# Altium PCB HBridgeMainBoard.PcbDoc (part 3 of 3)
Units mm, origin at the board's own origin, x right, y up, seen from the top; angles counter-clockwise.
Board outline 100 x 50 mm, 2 copper layers (Top Layer, Bottom Layer); 90 components, 87 nets, 308 pads, 1694 vias.
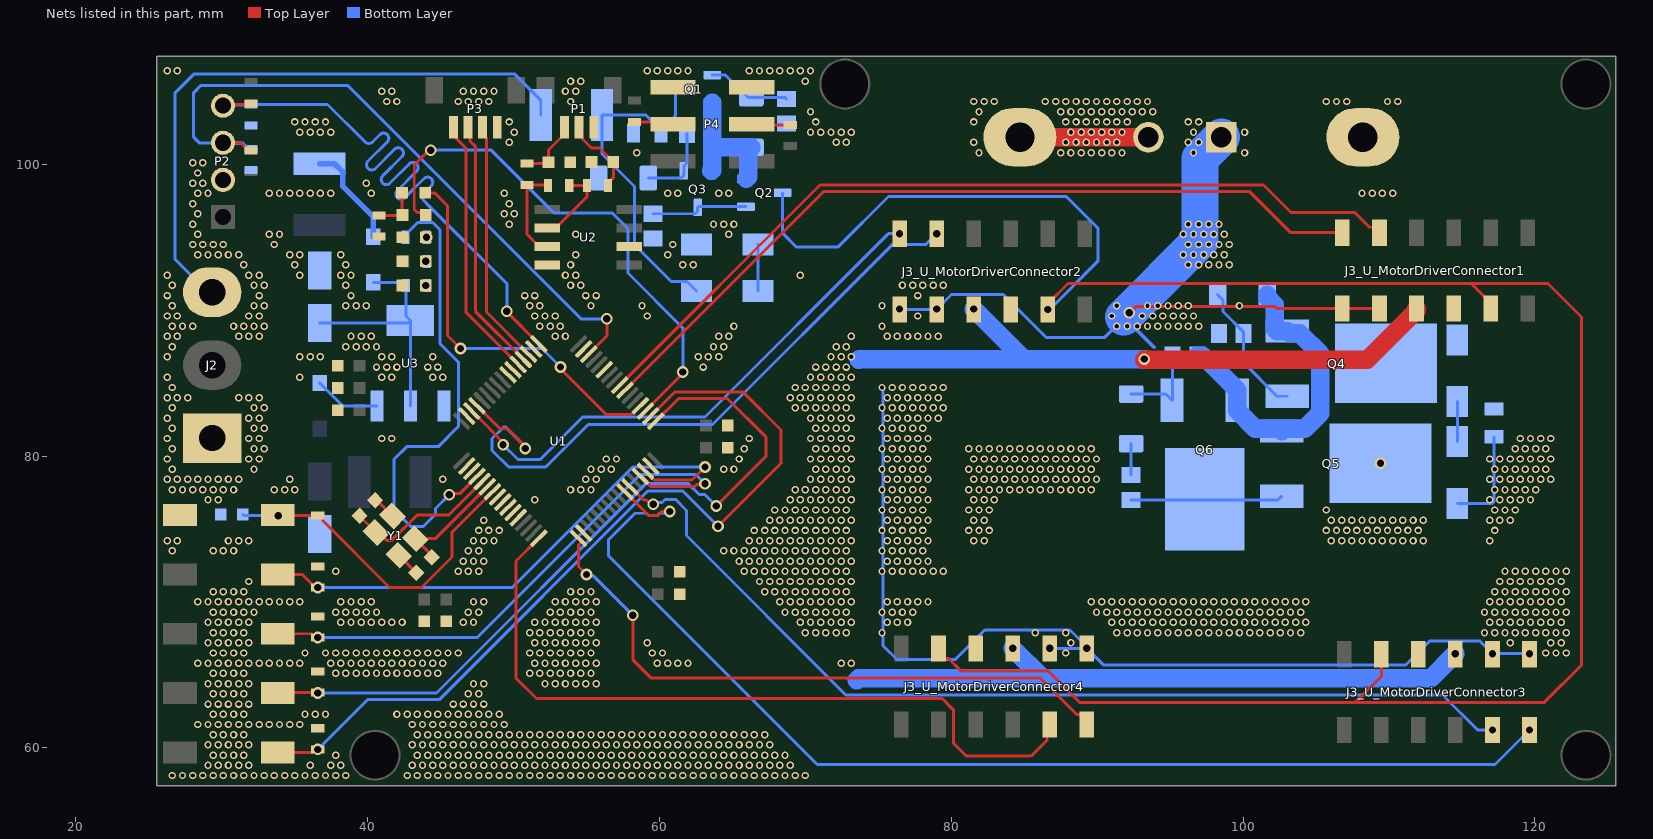
[diagram p2: the nets of this part, all layers, seen from the top]

## Via types
v1: diameter 0.508, hole 0.3, Top Layer to Bottom Layer, tented both sides, 1624 vias
v2: diameter 0.8, hole 0.5, Top Layer to Bottom Layer, tented both sides, 64 vias
v3: diameter 0.8, hole 0.5, Top Layer to Bottom Layer, 6 vias

## Nets (pads, with @x,y where several pads share a name; then routed paths per layer and width w, separated by ;. In a path a pad name is that pad's centre, name@x,y a point inside that pad or via, vN(x,y) a via of type N, cw(c..) or ccw(c..) an arc to the next point about the centre after c; other vN are vias at no path point) (continued)
GND: C1.1 C2.1 C3.1 C4.1 C5.1 C6.1 C7.1 C8.1 C9.1 C10.1 C11.1 C12.1 C13.1 C14.1 C15.2 C16.2 C17.1 D3.1 D4.1 D7.1 D10.C D11.A J2.1 J3_U_MotorDriverConnector1.8 J3_U_MotorDriverConnector2.8 J3_U_MotorDriverConnector3.8 J3_U_MotorDriverConnector4.8 P1.3 P2.2 P3.4 P4.5 P4.6 R1.1 R7.1 R8.1 R11_U_MotorDriverConnector1.1 R11_U_MotorDriverConnector2.1 R11_U_MotorDriverConnector3.1 R11_U_MotorDriverConnector4.1 R17.1 R18.1 SW1.1 U1.12 U1.18 U1.31 U1.47 U1.63 U2.2 U2.8 U3.1 Y1.2 Y1.4 | length 92.6
  Top Layer w0.203: C11.1@40.498,76.966 40.624,76.966 Y1.4@41.698,75.893 ; Y1.2@42.122,73.205 C12.1@43.322,72.006
  Top Layer w1.27: v2@93.218,86.614 108.521,86.614 111.887,89.98 J3_U_MotorDriverConnector1.8@111.887,90.11
  Bottom Layer w1.27: 73.533,64.643 73.66,64.77 86.264,64.77 ; 73.66,86.614 73.691,86.645 84.963,86.645 ; v2(81.534,90.074) 84.963,86.645 ; v2(84.201,66.833) 86.264,64.77 ; v2(93.218,86.645) 84.963,86.645 ; v2(114.549,66.446) 112.872,64.77 86.264,64.77
  other v1: 26.6,58.1 27.3,58.1 28,58.1 28.7,58.1 29.4,58.1 30.1,58.1 30.8,58.1 31.5,58.1 32.2,58.1 32.9,58.1 33.6,58.1 34.3,58.1 35,58.1 35.7,58.1 36.4,58.1 37.1,58.1 37.8,58.1 38.5,58.1 42.7,58.1 43.4,58.1 44.1,58.1 44.8,58.1 45.5,58.1 46.2,58.1 46.9,58.1 47.6,58.1 48.3,58.1 49,58.1 49.7,58.1 50.4,58.1 51.1,58.1 51.8,58.1 52.5,58.1 53.2,58.1 53.9,58.1 54.6,58.1 55.3,58.1 56,58.1 56.7,58.1 57.4,58.1 58.1,58.1 58.8,58.1 59.5,58.1 60.2,58.1 60.9,58.1 61.6,58.1 62.3,58.1 63,58.1 63.7,58.1 64.4,58.1 65.1,58.1 65.8,58.1 66.5,58.1 67.2,58.1 67.9,58.1 68.6,58.1 69.3,58.1 70,58.1 29.05,58.8 29.75,58.8 30.45,58.8 31.15,58.8 31.85,58.8 36.05,58.8 37.45,58.8 38.15,58.8 43.05,58.8 43.75,58.8 44.45,58.8 45.15,58.8 45.85,58.8 46.55,58.8 47.25,58.8 47.95,58.8 48.65,58.8 49.35,58.8 50.05,58.8 50.75,58.8 51.45,58.8 52.15,58.8 52.85,58.8 53.55,58.8 54.25,58.8 54.95,58.8 55.65,58.8 56.35,58.8 57.05,58.8 57.75,58.8 58.45,58.8 59.15,58.8 59.85,58.8 60.55,58.8 61.25,58.8 61.95,58.8 62.65,58.8 63.35,58.8 64.05,58.8 64.75,58.8 65.45,58.8 66.15,58.8 66.85,58.8 67.55,58.8 68.25,58.8 68.95,58.8 29.4,59.5 30.1,59.5 30.8,59.5 31.5,59.5 37.8,59.5 43.4,59.5 44.1,59.5 44.8,59.5 45.5,59.5 46.2,59.5 46.9,59.5 47.6,59.5 48.3,59.5 49,59.5 49.7,59.5 50.4,59.5 51.1,59.5 51.8,59.5 52.5,59.5 53.2,59.5 53.9,59.5 54.6,59.5 55.3,59.5 56,59.5 56.7,59.5 57.4,59.5 58.1,59.5 58.8,59.5 59.5,59.5 60.2,59.5 60.9,59.5 61.6,59.5 62.3,59.5 63,59.5 63.7,59.5 64.4,59.5 65.1,59.5 65.8,59.5 66.5,59.5 67.2,59.5 67.9,59.5 68.6,59.5 29.05,60.2 29.75,60.2 30.45,60.2 31.15,60.2 31.85,60.2 43.05,60.2 43.75,60.2 44.45,60.2 45.15,60.2 45.85,60.2 46.55,60.2 47.25,60.2 47.95,60.2 48.65,60.2 49.35,60.2 50.05,60.2 50.75,60.2 51.45,60.2 52.15,60.2 52.85,60.2 53.55,60.2 54.25,60.2 54.95,60.2 55.65,60.2 56.35,60.2 57.05,60.2 57.75,60.2 58.45,60.2 59.15,60.2 59.85,60.2 60.55,60.2 61.25,60.2 61.95,60.2 62.65,60.2 63.35,60.2 64.05,60.2 64.75,60.2 65.45,60.2 66.15,60.2 66.85,60.2 67.55,60.2 29.4,60.9 30.1,60.9 30.8,60.9 31.5,60.9 43.4,60.9 44.1,60.9 44.8,60.9 45.5,60.9 46.2,60.9 46.9,60.9 47.6,60.9 48.3,60.9 49,60.9 49.7,60.9 50.4,60.9 51.1,60.9 51.8,60.9 52.5,60.9 53.2,60.9 53.9,60.9 54.6,60.9 55.3,60.9 56,60.9 56.7,60.9 57.4,60.9 58.1,60.9 58.8,60.9 59.5,60.9 60.2,60.9 60.9,60.9 61.6,60.9 62.3,60.9 63,60.9 63.7,60.9 64.4,60.9 65.1,60.9 65.8,60.9 66.5,60.9 67.2,60.9 28.35,61.6 29.05,61.6 29.75,61.6 30.45,61.6 31.15,61.6 31.85,61.6 32.55,61.6 33.25,61.6 33.95,61.6 34.65,61.6 35.35,61.6 43.05,61.6 43.75,61.6 44.45,61.6 45.15,61.6 45.85,61.6 46.55,61.6 47.25,61.6 47.95,61.6 48.65,61.6 49.35,61.6 29.4,62.3 30.1,62.3 30.8,62.3 31.5,62.3 35.7,62.3 36.4,62.3 37.1,62.3 42,62.3 42.7,62.3 43.4,62.3 44.1,62.3 44.8,62.3 45.5,62.3 46.2,62.3 46.9,62.3 47.6,62.3 48.3,62.3 49,62.3 29.05,63 29.75,63 30.45,63 31.15,63 31.85,63 45.85,63 46.55,63 47.25,63 47.95,63 29.4,63.7 30.1,63.7 30.8,63.7 31.5,63.7 46.9,63.7 47.6,63.7 29.05,64.4 29.75,64.4 30.45,64.4 31.15,64.4 31.85,64.4 47.25,64.4 47.95,64.4 52.15,64.4 52.85,64.4 53.55,64.4 54.25,64.4 54.95,64.4 55.65,64.4 29.4,65.1 30.1,65.1 30.8,65.1 31.5,65.1 37.8,65.1 38.5,65.1 39.2,65.1 39.9,65.1 40.6,65.1 41.3,65.1 42,65.1 42.7,65.1 43.4,65.1 44.1,65.1 44.8,65.1 51.1,65.1 51.8,65.1 52.5,65.1 53.2,65.1 53.9,65.1 54.6,65.1 55.3,65.1 28.35,65.8 29.05,65.8 29.75,65.8 30.45,65.8 31.15,65.8 31.85,65.8 32.55,65.8 33.25,65.8 33.95,65.8 34.65,65.8 35.35,65.8 37.45,65.8 38.15,65.8 38.85,65.8 39.55,65.8 40.25,65.8 40.95,65.8 41.65,65.8 42.35,65.8 43.05,65.8 43.75,65.8 44.45,65.8 45.15,65.8 51.45,65.8 52.15,65.8 52.85,65.8 53.55,65.8 54.25,65.8 54.95,65.8 55.65,65.8 59.85,65.8 60.55,65.8 61.25,65.8 61.95,65.8 72.45,65.8 73.15,65.8 29.4,66.5 30.1,66.5 30.8,66.5 31.5,66.5 35.7,66.5 37.1,66.5 37.8,66.5 38.5,66.5 39.2,66.5 39.9,66.5 40.6,66.5 41.3,66.5 42,66.5 42.7,66.5 43.4,66.5 44.1,66.5 44.8,66.5 45.5,66.5 46.2,66.5 51.1,66.5 51.8,66.5 52.5,66.5 53.2,66.5 53.9,66.5 54.6,66.5 55.3,66.5 59.5,66.5 60.2,66.5 29.05,67.2 29.75,67.2 30.45,67.2 31.15,67.2 31.85,67.2 51.45,67.2 52.15,67.2 52.85,67.2 53.55,67.2 54.25,67.2 54.95,67.2 55.65,67.2 59.15,67.2 29.4,67.9 30.1,67.9 30.8,67.9 31.5,67.9 51.1,67.9 51.8,67.9 52.5,67.9 53.2,67.9 53.9,67.9 54.6,67.9 55.3,67.9 70,67.9 70.7,67.9 71.4,67.9 72.1,67.9 72.8,67.9 29.05,68.6 29.75,68.6 30.45,68.6 31.15,68.6 31.85,68.6 38.15,68.6 38.85,68.6 39.55,68.6 40.25,68.6 40.95,68.6 41.65,68.6 42.35,68.6 46.55,68.6 47.25,68.6 51.45,68.6 52.15,68.6 52.85,68.6 53.55,68.6 54.25,68.6 54.95,68.6 55.65,68.6 69.65,68.6 70.35,68.6 71.05,68.6 71.75,68.6 72.45,68.6 73.15,68.6 29.4,69.3 30.1,69.3 30.8,69.3 31.5,69.3 32.2,69.3 37.8,69.3 38.5,69.3 39.2,69.3 39.9,69.3 40.6,69.3 46.9,69.3 47.6,69.3 52.5,69.3 53.2,69.3 53.9,69.3 54.6,69.3 55.3,69.3 68.6,69.3 69.3,69.3 70,69.3 70.7,69.3 71.4,69.3 72.1,69.3 72.8,69.3 28.35,70 29.05,70 29.75,70 30.45,70 31.15,70 31.85,70 32.55,70 33.25,70 33.95,70 34.65,70 35.35,70 38.15,70 38.85,70 39.55,70 40.25,70 47.25,70 47.95,70 52.85,70 53.55,70 54.25,70 54.95,70 55.65,70 68.25,70 68.95,70 69.65,70 70.35,70 71.05,70 71.75,70 72.45,70 73.15,70 29.4,70.7 30.1,70.7 30.8,70.7 31.5,70.7 53.9,70.7 54.6,70.7 55.3,70.7 67.2,70.7 67.9,70.7 68.6,70.7 69.3,70.7 70,70.7 70.7,70.7 71.4,70.7 72.1,70.7 72.8,70.7 31.85,71.4 66.85,71.4 67.55,71.4 68.25,71.4 68.95,71.4 69.65,71.4 70.35,71.4 71.05,71.4 71.75,71.4 72.45,71.4 73.15,71.4 37.8,72.1 46.2,72.1 46.9,72.1 47.6,72.1 65.8,72.1 66.5,72.1 67.2,72.1 67.9,72.1 68.6,72.1 69.3,72.1 70,72.1 70.7,72.1 71.4,72.1 72.1,72.1 72.8,72.1 46.55,72.8 47.25,72.8 47.95,72.8 65.45,72.8 66.15,72.8 66.85,72.8 67.55,72.8 68.25,72.8 68.95,72.8 69.65,72.8 70.35,72.8 71.05,72.8 71.75,72.8 72.45,72.8 73.15,72.8 26.6,73.5 29.4,73.5 30.1,73.5 30.8,73.5 46.9,73.5 47.6,73.5 64.4,73.5 65.1,73.5 65.8,73.5 66.5,73.5 67.2,73.5 67.9,73.5 68.6,73.5 69.3,73.5 70,73.5 70.7,73.5 71.4,73.5 72.1,73.5 72.8,73.5 26.25,74.2 26.95,74.2 30.45,74.2 31.15,74.2 31.85,74.2 47.25,74.2 47.95,74.2 48.65,74.2 66.15,74.2 66.85,74.2 67.55,74.2 68.25,74.2 68.95,74.2 69.65,74.2 70.35,74.2 71.05,74.2 71.75,74.2 72.45,74.2 73.15,74.2 47.6,74.9 48.3,74.9 49,74.9 66.5,74.9 67.2,74.9 67.9,74.9 68.6,74.9 69.3,74.9 70,74.9 70.7,74.9 71.4,74.9 72.1,74.9 72.8,74.9 47.95,75.6 67.55,75.6 68.25,75.6 68.95,75.6 69.65,75.6 70.35,75.6 71.05,75.6 71.75,75.6 72.45,75.6 73.15,75.6 67.9,76.3 68.6,76.3 69.3,76.3 70,76.3 70.7,76.3 71.4,76.3 72.1,76.3 72.8,76.3 29.05,77 29.75,77 51.45,77 68.95,77 69.65,77 70.35,77 71.05,77 71.75,77 72.45,77 73.15,77 26.6,77.7 27.3,77.7 28,77.7 28.7,77.7 29.4,77.7 30.1,77.7 30.8,77.7 33.6,77.7 34.3,77.7 35,77.7 53.9,77.7 54.6,77.7 55.3,77.7 69.3,77.7 70,77.7 70.7,77.7 71.4,77.7 72.1,77.7 72.8,77.7 26.25,78.4 26.95,78.4 27.65,78.4 28.35,78.4 29.05,78.4 29.75,78.4 30.45,78.4 31.15,78.4 34.65,78.4 45.15,78.4 54.95,78.4 55.65,78.4 70.35,78.4 71.05,78.4 71.75,78.4 72.45,78.4 73.15,78.4 26.6,79.1 32.2,79.1 55.3,79.1 56,79.1 56.7,79.1 64.4,79.1 65.1,79.1 70.7,79.1 71.4,79.1 72.1,79.1 72.8,79.1 26.25,79.8 31.85,79.8 32.55,79.8 56.35,79.8 57.05,79.8 65.45,79.8 70.35,79.8 71.05,79.8 71.75,79.8 72.45,79.8 73.15,79.8 26.6,80.5 32.2,80.5 32.9,80.5 65.8,80.5 70.7,80.5 71.4,80.5 72.1,80.5 72.8,80.5 26.25,81.2 31.85,81.2 32.55,81.2 40.95,81.2 41.65,81.2 66.15,81.2 70.35,81.2 71.05,81.2 71.75,81.2 72.45,81.2 73.15,81.2 26.6,81.9 32.2,81.9 32.9,81.9 70.7,81.9 71.4,81.9 72.1,81.9 72.8,81.9 26.25,82.6 31.85,82.6 32.55,82.6 70.35,82.6 71.05,82.6 71.75,82.6 72.45,82.6 73.15,82.6 26.6,83.3 32.2,83.3 32.9,83.3 69.3,83.3 70,83.3 70.7,83.3 71.4,83.3 72.1,83.3 72.8,83.3 26.25,84 26.95,84 27.65,84 31.15,84 31.85,84 32.55,84 68.95,84 69.65,84 70.35,84 71.05,84 71.75,84 72.45,84 73.15,84 26.6,84.7 69.3,84.7 70,84.7 70.7,84.7 71.4,84.7 72.1,84.7 72.8,84.7 26.25,85.4 35.35,85.4 40.95,85.4 41.65,85.4 44.45,85.4 45.15,85.4 70.35,85.4 71.05,85.4 71.75,85.4 72.45,85.4 73.15,85.4 40.6,86.1 41.3,86.1 42,86.1 44.1,86.1 44.8,86.1 63,86.1 70.7,86.1 71.4,86.1 72.1,86.1 72.8,86.1 26.25,86.8 35.35,86.8 36.05,86.8 36.75,86.8 40.95,86.8 41.65,86.8 44.45,86.8 62.65,86.8 63.35,86.8 64.05,86.8 71.75,86.8 72.45,86.8 73.15,86.8 26.6,87.5 38.5,87.5 39.2,87.5 39.9,87.5 40.6,87.5 63.7,87.5 64.4,87.5 72.1,87.5 72.8,87.5 26.25,88.2 26.95,88.2 31.15,88.2 31.85,88.2 32.55,88.2 38.85,88.2 39.55,88.2 40.25,88.2 52.85,88.2 53.55,88.2 64.05,88.2 64.75,88.2 73.15,88.2 26.6,88.9 27.3,88.9 28,88.9 30.8,88.9 31.5,88.9 32.2,88.9 32.9,88.9 51.8,88.9 52.5,88.9 53.2,88.9 65.1,88.9 26.25,89.6 26.95,89.6 31.85,89.6 32.55,89.6 51.45,89.6 52.15,89.6 52.85,89.6 59.15,89.6 26.6,90.3 32.2,90.3 32.9,90.3 38.5,90.3 39.2,90.3 39.9,90.3 51.1,90.3 51.8,90.3 55.3,90.3 58.8,90.3 26.25,91 32.55,91 38.85,91 50.75,91 51.45,91 54.95,91 55.65,91 26.6,91.7 32.2,91.7 32.9,91.7 38.5,91.7 53.9,91.7 54.6,91.7 26.25,92.4 31.85,92.4 32.55,92.4 35.35,92.4 38.15,92.4 38.85,92.4 53.55,92.4 54.25,92.4 69.65,92.4 31.5,93.1 35,93.1 38.5,93.1 53.9,93.1 61.6,93.1 62.3,93.1 28.35,93.8 29.05,93.8 29.75,93.8 30.45,93.8 31.15,93.8 34.65,93.8 35.35,93.8 38.15,93.8 54.25,93.8 60.55,93.8 28,94.5 28.7,94.5 29.4,94.5 30.1,94.5 33.6,94.5 60.9,94.5 28.35,95.2 33.25,95.2 33.95,95.2 54.25,95.2 64.75,95.2 28,95.9 49.7,95.9 63.7,95.9 64.4,95.9 65.1,95.9 28.35,96.6 49.35,96.6 50.05,96.6 28,97.3 49.7,97.3 28.35,98 29.05,98 33.25,98 33.95,98 34.65,98 35.35,98 36.05,98 36.75,98 37.45,98 40.25,98 49.35,98 60.55,98 61.25,98 64.05,98 64.75,98 28,98.7 28.7,98.7 39.9,98.7 28.35,99.4 28,100.1 28.7,100.1 58.45,100.8 49.7,101.5 72.1,101.5 72.8,101.5 35.35,102.2 36.05,102.2 36.75,102.2 37.45,102.2 50.05,102.2 70.35,102.2 71.05,102.2 71.75,102.2 72.45,102.2 73.15,102.2 35,102.9 35.7,102.9 36.4,102.9 37.1,102.9 49.7,102.9 70.7,102.9 70.35,103.6 41.3,104.3 42,104.3 46.2,104.3 46.9,104.3 47.6,104.3 48.3,104.3 53.9,104.3 40.95,105 41.65,105 46.55,105 47.25,105 47.95,105 48.65,105 53.55,105 54.25,105 53.9,105.7 54.6,105.7 70,105.7 26.25,106.4 26.95,106.4 59.15,106.4 59.85,106.4 60.55,106.4 61.25,106.4 61.95,106.4 66.15,106.4 66.85,106.4 67.55,106.4 68.25,106.4 68.95,106.4 69.65,106.4 70.35,106.4
MGND: C18.1 D14.C D15.A J1.1 J3_U_MotorDriverConnector1.10 J3_U_MotorDriverConnector1.12 J3_U_MotorDriverConnector2.10 J3_U_MotorDriverConnector2.12 J3_U_MotorDriverConnector3.10 J3_U_MotorDriverConnector3.12 J3_U_MotorDriverConnector4.10 J3_U_MotorDriverConnector4.12 R20.1 R21.1 | length 130.3
  Top Layer w0.203: v2@92.202,89.789 92.65,90.237 102.202,90.237 102.329,90.11 J3_U_MotorDriverConnector1.10@109.347,90.11
  Bottom Layer w0.203: v1@75.43,84.669 75.311,84.55 75.311,67.003 76.268,66.046 80.27,66.046 82.296,68.072 88.138,68.072 89.121,67.089 89.121,66.921 89.002,66.802 v2@86.868,66.802 ; v2@76.327,90.043 78.994,90.043 80.015,91.064 83.561,91.064 86.487,88.138 90.52,88.138 v2(92.202,89.82) ; v2(89.281,66.833) 90.448,65.665 111.131,65.665 112.776,67.31 116.236,67.31 v2(117.094,66.452) v2(119.634,66.452) ; R21.1@92.329,78.701 D15.A@92.329,80.85 ; D14.C@114.681,76.752 117.077,76.752 117.196,76.871 C18.1@117.196,81.321
  Bottom Layer w0.254: 91.821,89.535 93.902,87.454
  Bottom Layer w2.54: 91.821,89.535 97.04,94.754 97.04,100.382 J1.1@98.512,101.854
  other v1: 87.85,66.5 120.75,66.5 121.45,66.5 122.15,66.5 88.2,67.2 118.3,67.2 121.1,67.2 121.8,67.2 75.25,67.9 85.75,67.9 87.85,67.9 91.35,67.9 92.05,67.9 92.75,67.9 93.45,67.9 94.15,67.9 94.85,67.9 95.55,67.9 96.25,67.9 96.95,67.9 97.65,67.9 98.35,67.9 99.05,67.9 99.75,67.9 100.45,67.9 101.15,67.9 101.85,67.9 102.55,67.9 103.25,67.9 103.95,67.9 116.55,67.9 117.25,67.9 117.95,67.9 118.65,67.9 119.35,67.9 120.05,67.9 120.75,67.9 121.45,67.9 122.15,67.9 75.6,68.6 76.3,68.6 77,68.6 91,68.6 91.7,68.6 92.4,68.6 93.1,68.6 93.8,68.6 94.5,68.6 95.2,68.6 95.9,68.6 96.6,68.6 97.3,68.6 98,68.6 98.7,68.6 99.4,68.6 100.1,68.6 100.8,68.6 101.5,68.6 102.2,68.6 102.9,68.6 103.6,68.6 104.3,68.6 116.9,68.6 117.6,68.6 118.3,68.6 119,68.6 119.7,68.6 120.4,68.6 121.1,68.6 121.8,68.6 75.25,69.3 75.95,69.3 76.65,69.3 77.35,69.3 89.95,69.3 90.65,69.3 91.35,69.3 92.05,69.3 92.75,69.3 93.45,69.3 94.15,69.3 94.85,69.3 95.55,69.3 96.25,69.3 96.95,69.3 97.65,69.3 98.35,69.3 99.05,69.3 99.75,69.3 100.45,69.3 101.15,69.3 101.85,69.3 102.55,69.3 103.25,69.3 103.95,69.3 116.55,69.3 117.25,69.3 117.95,69.3 118.65,69.3 119.35,69.3 120.05,69.3 120.75,69.3 121.45,69.3 122.15,69.3 75.6,70 76.3,70 77,70 77.7,70 78.4,70 89.6,70 90.3,70 91,70 91.7,70 92.4,70 93.1,70 93.8,70 94.5,70 95.2,70 95.9,70 96.6,70 97.3,70 98,70 98.7,70 99.4,70 100.1,70 100.8,70 101.5,70 102.2,70 102.9,70 103.6,70 104.3,70 116.9,70 117.6,70 118.3,70 119,70 119.7,70 120.4,70 121.1,70 121.8,70 117.25,70.7 117.95,70.7 118.65,70.7 119.35,70.7 120.05,70.7 120.75,70.7 121.45,70.7 122.15,70.7 117.6,71.4 118.3,71.4 119,71.4 119.7,71.4 120.4,71.4 121.1,71.4 121.8,71.4 75.25,72.1 75.95,72.1 76.65,72.1 77.35,72.1 78.05,72.1 78.75,72.1 79.45,72.1 117.95,72.1 118.65,72.1 119.35,72.1 120.05,72.1 120.75,72.1 121.45,72.1 122.15,72.1 75.6,72.8 76.3,72.8 77,72.8 77.7,72.8 78.4,72.8 75.25,73.5 75.95,73.5 76.65,73.5 77.35,73.5 78.05,73.5 75.6,74.2 76.3,74.2 77,74.2 77.7,74.2 78.4,74.2 116.9,74.2 75.25,74.9 75.95,74.9 76.65,74.9 77.35,74.9 78.05,74.9 117.25,74.9 75.6,75.6 76.3,75.6 77,75.6 77.7,75.6 78.4,75.6 116.9,75.6 117.6,75.6 118.3,75.6 75.25,76.3 75.95,76.3 76.65,76.3 77.35,76.3 78.05,76.3 117.25,76.3 117.95,76.3 118.65,76.3 75.6,77 76.3,77 77,77 77.7,77 78.4,77 116.9,77 117.6,77 118.3,77 119,77 119.7,77 75.25,77.7 75.95,77.7 76.65,77.7 77.35,77.7 78.05,77.7 117.25,77.7 117.95,77.7 118.65,77.7 119.35,77.7 120.05,77.7 75.6,78.4 76.3,78.4 77,78.4 77.7,78.4 78.4,78.4 116.9,78.4 117.6,78.4 118.3,78.4 119,78.4 119.7,78.4 120.4,78.4 121.1,78.4 75.25,79.1 75.95,79.1 76.65,79.1 77.35,79.1 78.05,79.1 117.25,79.1 117.95,79.1 118.65,79.1 119.35,79.1 120.05,79.1 120.75,79.1 75.6,79.8 76.3,79.8 77,79.8 77.7,79.8 78.4,79.8 116.9,79.8 117.6,79.8 118.3,79.8 119,79.8 119.7,79.8 120.4,79.8 121.1,79.8 75.25,80.5 75.95,80.5 76.65,80.5 77.35,80.5 78.05,80.5 118.65,80.5 119.35,80.5 120.05,80.5 120.75,80.5 75.6,81.2 76.3,81.2 77,81.2 77.7,81.2 78.4,81.2 119,81.2 119.7,81.2 120.4,81.2 121.1,81.2 75.25,81.9 75.95,81.9 76.65,81.9 77.35,81.9 78.05,81.9 75.6,82.6 76.3,82.6 77,82.6 77.7,82.6 78.4,82.6 79.1,82.6 75.25,83.3 75.95,83.3 76.65,83.3 77.35,83.3 78.05,83.3 78.75,83.3 79.45,83.3 75.6,84 76.3,84 77,84 77.7,84 78.4,84 79.1,84 75.25,84.7 75.95,84.7 76.65,84.7 77.35,84.7 78.05,84.7 78.75,84.7 79.45,84.7 75.6,88.2 76.3,88.2 77,88.2 77.7,88.2 78.4,88.2 79.1,88.2 75.25,88.9 91.35,88.9 92.05,88.9 92.75,88.9 93.45,88.9 94.15,88.9 94.85,88.9 95.55,88.9 96.25,88.9 96.95,88.9 77.7,89.6 91,89.6 93.1,89.6 93.8,89.6 94.5,89.6 95.2,89.6 95.9,89.6 96.6,89.6 75.25,90.3 91.35,90.3 93.45,90.3 94.15,90.3 94.85,90.3 95.55,90.3 96.25,90.3 99.75,90.3 77.7,91 76.65,91.7 77.35,91.7 78.05,91.7 78.75,91.7 79.45,91.7 96.25,93.1 96.95,93.1 97.65,93.1 98.35,93.1 99.05,93.1 95.9,93.8 96.6,93.8 97.3,93.8 98,93.8 98.7,93.8 96.25,94.5 96.95,94.5 97.65,94.5 98.35,94.5 99.05,94.5 95.9,95.2 96.6,95.2 97.3,95.2 98,95.2 98.7,95.2 96.25,95.9 96.95,95.9 97.65,95.9 98.35,95.9 96.6,100.8 100.1,100.8 96.25,101.5 96.95,101.5 96.6,102.2 100.1,102.2 96.25,102.9 96.95,102.9
  other v2: 86.741,66.833 76.454,90.074 78.994,90.074
NetC13_2: C13.2 P1.1 R12.2 | length 4.4
  Top Layer w0.203: R12.2@50.927,100.039 52.299,100.039 C13.2@52.387,100.127 52.387,100.971 53.483,102.067 P1.1@53.483,102.542
NetC14_2: C14.2 P1.2 R14.2 | length 5.4
  Top Layer w0.203: P1.2@54.483,102.542 54.681,102.344 54.681,101.766 55.339,101.108 55.877,101.108 C14.2@56.833,100.152 56.833,99.082 56.478,98.727 R14.2@56.478,98.552
NetC16_1: C16.1 D6.A R15.2 U3.2 U3.4 | length 17
  Bottom Layer w0.203: C16.1@36.703,89.132 42.768,89.132 U3.4@42.926,89.29 ; D6.A@40.386,91.902 42.446,91.902 42.619,91.729 R15.2@42.619,91.694 42.619,89.597 U3.4@42.926,89.29 ; U3.2@42.926,83.43 U3.4@42.926,89.29
NetD1_1: D1.1 D2.1 R1.2 | length 3.2
  Top Layer w0.203: R1.2@40.767,96.483 42.343,96.483 D1.1@42.38,96.52 42.342,96.558 D2.1@42.342,98.044
NetD3_2: D3.2 R2.1
  other v2: 43.98,93.345
NetD4_2: D4.2 R3.1
  other v2: 44.032,94.996
NetD5_K: D5.K U3.3 | length 4.6
  Bottom Layer w0.203: D5.K@36.703,85.009 38.282,83.43 U3.3@40.636,83.43
NetD7_2: D7.2 R15.1
  other v2: 43.98,91.694
NetD8_A: D8.A D10.A | length 3.2
  Bottom Layer w0.203: D8.A@66.758,91.313 D10.A@66.758,94.488
NetD9_A: D9.A Q1.1 R17.2 | length 5.8
  Bottom Layer w0.203: Q1.1@63.612,106.106 64.522,106.106 66.058,104.57 D9.A@66.294,104.57 68.619,104.57 R17.2@68.707,104.482
NetD9_K: D9.K Q1.2 Q2.2 Q3.2 R16.2 | length 9.9
  Bottom Layer w1.27: Q3.2@63.561,99.553 63.612,99.604 63.612,101.346 ; Q1.2@63.612,104.206 63.612,101.346 ; Q2.2@65.928,98.994 66.079,99.145 66.079,101.135 66.114,101.17 D9.K@66.294,101.17 63.788,101.17 63.612,101.346
NetD11_K: D11.K Q3.1 R16.1 | length 5.5
  Bottom Layer w0.203: D11.K@59.231,99.06 61.468,99.06 61.661,99.253 61.661,99.863 61.888,100.09 R16.1@61.888,102.108
NetD12_A: D12.A D14.A | length 2.8
  Bottom Layer w0.203: D14.A@114.681,80.982 D12.A@114.681,83.737
NetD13_A: D13.A Q4.1 R20.2 | length 9.3
  Bottom Layer w0.203: D13.A@98.249,91.059 98.625,90.683 98.625,89.904 100.037,88.492 R20.2@100.037,88.392 100.037,86.386 102.324,84.099 Q4.1@103.022,84.099
NetD13_K: D13.K Q4.3 Q5.3 Q6.3 R19.2 | length 22.3
  Bottom Layer w1.27: R19.2@96.862,86.868 96.877,86.853 97.259,86.853 99.593,84.519 Q6.3@99.593,83.82 99.593,83.121 100.838,81.877 102.476,81.877 Q5.3@102.641,81.712 102.806,81.877 104.229,81.877 105.283,82.931 105.283,87.008 103.886,88.405 103.188,88.405 Q4.3@103.022,88.57 102.324,88.57 102.159,88.735 102.159,90.369 101.649,90.879 D13.K@101.649,91.059
NetD15_K: D15.K Q6.1 R19.1 | length 6
  Bottom Layer w0.203: D15.K@92.329,84.25 94.693,84.25 Q6.1@95.123,83.82 95.162,83.859 R19.1@95.162,86.868
NetP2_3: P2.3 R5.1 R8.2 U1.46 | length 47.6
  Top Layer w0.203: P2.3@30.075,101.473 31.284,101.473 31.829,100.928 R5.1@32.004,100.928 ; U1.46@55.151,86.98 55.151,86.986 56.388,88.223 v2(56.388,89.408)
  Bottom Layer w0.203: R8.2@32.004,101.055 31.829,101.055 31.411,101.473 P2.3@30.075,101.473 28.448,101.473 28.067,101.854 28.067,104.902 28.575,105.41 38.608,105.41 54.61,89.408 v2(56.388,89.408)
NetP2_4: P2.4 R4.1 R7.2 U1.49 | length 47.5
  Top Layer w0.203: P2.4@30.075,104.013 30.157,104.095 31.922,104.095 R4.1@32.004,104.177 ; v2(49.53,89.916) 49.53,89.885 U1.49@51.728,87.687
  Bottom Layer w0.203: P2.4@30.075,104.013 30.12,104.058 31.959,104.058 R7.2@32.004,104.103 37.248,104.103 39.751,101.6 39.823,101.528 ccw(c40.074,101.78) 40.326,101.528 40.833,102.035 cw(c41.085,101.784) 41.336,102.035 cw(c41.085,101.784) 41.336,101.533 40.02,100.217 ccw(c40.271,99.965) 40.02,99.714 ccw(c40.271,99.965) 40.523,99.714 41.839,101.03 cw(c42.09,100.778) 42.342,101.03 cw(c42.09,100.778) 42.342,100.527 41.026,99.211 ccw(c41.277,98.959) 41.026,98.708 ccw(c41.277,98.959) 41.529,98.708 42.845,100.024 cw(c43.096,99.772) 43.348,100.024 cw(c43.096,99.772) 43.348,99.521 42.032,98.205 ccw(c42.283,97.954) 42.032,97.702 ccw(c42.283,97.954) 42.534,97.702 43.85,99.018 cw(c44.102,98.767) 44.353,99.018 cw(c44.102,98.767) 44.353,98.515 43.846,98.008 ccw(c44.097,97.756) 43.846,97.505 44.188,97.163 49.53,91.821 v2(49.53,89.916)
NetP4_3: P4.3 R9.2 | length 2.6
  Top Layer w0.203: P4.3@66.327,102.743 66.364,102.706 R9.2@68.961,102.706
NetP4_4: P4.4 R10.2 | length 2.7
  Top Layer w0.203: R10.2@58.293,102.907 60.763,102.907 P4.4@60.927,102.743
NetQ2_1: Q2.1 Q3.3 R18.2 | length 6.7
  Bottom Layer w0.203: R18.2@59.563,96.608 62.418,96.608 62.611,96.801 Q3.3@62.611,97.043 62.662,97.094 Q2.1@65.928,97.094
NetQ5_1: Q5.1 Q6.4 R21.2 | length 10.4
  Bottom Layer w0.203: R21.2@92.329,77.001 102.401,77.001 Q5.1@102.641,77.241
NetR12_1: R12.1 R13.2 U2.7 | length 6.6
  Top Layer w0.203: U2.7@52.318,94.361 51.743,94.361 50.927,95.177 R12.1@50.927,98.589 52.324,98.589 R13.2@52.361,98.552
NetR13_1: R13.1 R14.1 U2.6 | length 5.6
  Top Layer w0.203: U2.6@52.318,95.631 52.893,95.631 55.028,97.766 R14.1@55.028,98.552 R13.1@53.811,98.552
OSC_IN: C11.2 U1.5 Y1.1 | length 10.8
  Top Layer w0.203: C11.2@39.437,75.906 39.437,75.89 Y1.1@40.566,74.761 40.741,74.761 41.28,74.222 41.646,74.222 43.37,75.946 45.537,75.946 47.839,78.248 U1.5@47.839,78.254
OSC_OUT: C12.2 U1.6 Y1.3 | length 8.2
  Top Layer w0.203: C12.2@44.383,73.065 44.383,73.208 Y1.3@43.254,74.337 43.324,74.266 44.029,74.266 44.1,74.337 44.629,74.337 U1.6@48.193,77.901
PA2: J3_U_MotorDriverConnector4.9 U1.16 | length 51.8
  Top Layer w0.203: U1.16@51.728,74.365 50.165,72.802 50.165,64.77 51.562,63.373 79.375,63.373 80.137,62.611 80.137,60.325 81.026,59.436 85.471,59.436 86.551,60.516 86.551,61.412 J3_U_MotorDriverConnector4.9@86.741,61.602
PA3: J3_U_MotorDriverConnector4.11 U1.17 | length 43.4
  Top Layer w0.203: U1.17@54.444,74.365 54.647,74.162 54.647,74.108 54.444,73.904 54.444,72.429 v2(54.991,71.882) ; v2(58.166,69.088) 58.166,66.04 59.436,64.77 86.113,64.77 88.595,62.288 88.883,62.288 89.281,61.889 J3_U_MotorDriverConnector4.11@89.281,61.602
  Bottom Layer w0.203: v2(54.991,71.882) 55.105,71.768 55.486,71.768 v2(58.166,69.088)
PA10: U1.43
PA15: U1.50
PB0: J3_U_MotorDriverConnector3.11 U1.26 | length 80.1
  Top Layer w0.203: U1.26@57.626,77.547 57.632,77.547 59.099,76.079 59.107,76.079 59.25,75.937 59.876,75.937 60.139,76.2 v2(60.706,76.2)
  Bottom Layer w0.203: v2(60.706,76.2) 60.592,76.086 60.295,76.086 60.289,76.079 60.019,76.079 59.876,75.937 59.25,75.937 59.107,76.079 58.323,76.079 56.515,74.272 56.515,73.152 70.815,58.852 117.265,58.852 v3(119.634,61.221)
PB1: J3_U_MotorDriverConnector3.9 U1.27 | length 67.3
  Top Layer w0.203: U1.27@57.979,77.901 57.985,77.901 58.895,76.991 59.103,76.991 59.402,76.692 v2(59.563,76.692)
  Bottom Layer w0.203: v2(59.563,76.692) 59.677,76.807 60.163,76.807 60.369,77.013 61.111,77.013 61.849,76.274 61.849,74.549 72.771,63.627 113.672,63.627 116.078,61.221 v3(117.094,61.221)
PB3: U1.55
PB8: J3_U_MotorDriverConnector2.9 U1.61 | length 46.3
  Top Layer w0.203: U1.61@47.486,83.444 49.028,81.902 49.543,81.902 50.8,80.645 v2(50.8,80.518)
  Bottom Layer w0.203: v2(50.8,80.518) 50.8,80.645 49.466,81.979 49.298,81.979 48.52,81.201 48.52,80.385 49.657,79.248 52.197,79.248 55.118,82.169 63.627,82.169 75.945,94.487 78.238,94.487 v2(78.994,95.243)
PB9: J3_U_MotorDriverConnector2.11 U1.62 | length 37.2
  Top Layer w0.203: U1.62@47.132,83.091 47.132,83.085 48.337,81.88 48.337,81.872 49.276,80.933 v2(49.276,80.772)
  Bottom Layer w0.203: v2(49.276,80.772) 50.292,79.756 51.816,79.756 54.737,82.677 63.119,82.677 75.685,95.243 v2(76.454,95.243)
PB10: R11_U_MotorDriverConnector4.2 SW2_U_MotorDriverConnector4.1 U1.29 | length 39.1
  Top Layer w0.203: SW2_U_MotorDriverConnector4.1@33.83,67.818 36.147,67.818 36.401,67.564 v2(36.576,67.564) ; U1.29@58.686,78.608 58.693,78.608 59.395,77.905 62.423,77.905 62.576,78.058 63.072,78.058 v2(63.119,78.105)
  Bottom Layer w0.203: v2(36.576,67.564) 47.498,67.564 58.674,78.74 62.484,78.74 v2(63.119,78.105)
PB11: R11_U_MotorDriverConnector3.2 SW2_U_MotorDriverConnector3.1 U1.30 | length 37.6
  Top Layer w0.203: SW2_U_MotorDriverConnector3.1@33.83,71.882 35.512,71.882 36.401,70.993 v2(36.576,70.993) ; U1.30@59.04,78.961 59.046,78.961 59.645,78.362 62.233,78.362 v2(63.119,79.248)
  Bottom Layer w0.203: v2@36.703,70.993 49.911,70.993 58.166,79.248 v2(63.119,79.248)
PB12: R11_U_MotorDriverConnector1.2 SW2_U_MotorDriverConnector1.1 U1.33 | length 52.1
  Top Layer w0.203: SW2_U_MotorDriverConnector1.1@33.83,63.754 33.867,63.791 R11_U_MotorDriverConnector1.2@36.576,63.791 ; U1.33@59.747,82.384 61.31,83.947 64.643,83.947 67.31,81.28 67.31,80.01 v2(63.881,76.581)
  Bottom Layer w0.203: v2(36.576,63.754) 44.704,63.754 59.055,78.105 61.976,78.105 62.732,77.349 63.113,77.349 v2(63.881,76.581)
PB13: R11_U_MotorDriverConnector2.2 SW2_U_MotorDriverConnector2.1 U1.34 | length 57.7
  Top Layer w0.203: SW2_U_MotorDriverConnector2.1@33.83,59.69 36.2,59.69 36.401,59.891 v2(36.576,59.891) ; U1.34@59.393,82.737 59.4,82.737 61.067,84.404 65.71,84.404 68.326,81.788 68.326,79.502 v2(64.008,75.184)
  Bottom Layer w0.203: v2(36.576,59.891) 39.982,63.297 44.893,63.297 59.194,77.597 61.595,77.597 v2(64.008,75.184)
PB14: D1.2 U1.35 | length 36.4
  Top Layer w0.203: D1.2@43.98,96.52 43.813,96.687 43.394,96.687 43.186,96.895 43.186,99.955 44.196,100.965 v2(44.323,100.965) ; U1.35@59.04,83.091 59.04,83.097 61.595,85.652 v2(61.595,85.756)
  Bottom Layer w0.203: v2(44.323,100.965) 48.468,100.965 52.786,96.647 56.769,96.647 57.829,95.587 57.829,92.539 61.595,88.773 v2@61.595,85.725
PB15: D2.2 U1.36 | length 26.6
  Top Layer w0.203: D2.2@43.942,98.044 44.577,98.044 45.466,97.155 45.466,88.265 v2(46.355,87.376) ; v2(53.213,86.106) 53.213,85.979 56.347,82.845 58.081,82.845 58.68,83.444 U1.36@58.686,83.444
  Bottom Layer w0.203: v2(46.355,87.376) 51.943,87.376 v2(53.213,86.106)
PC0: U1.8
PC1: U1.9
PC2: U1.10
PC3: U1.11
PC8: J3_U_MotorDriverConnector1.11 U1.39 | length 56
  Top Layer w0.203: U1.39@57.626,84.505 71.241,98.12 100.46,98.12 103.27,95.31 J3_U_MotorDriverConnector1.11@106.807,95.31
PC9: J3_U_MotorDriverConnector1.9 U1.40 | length 59.1
  Top Layer w0.203: U1.40@57.272,84.859 70.991,98.577 101.399,98.577 103.286,96.691 107.652,96.691 108.661,95.682 108.975,95.682 J3_U_MotorDriverConnector1.9@109.347,95.31
PC10: P3.3 U1.51 | length 16.9
  Top Layer w0.203: P3.3@47.871,102.542 47.871,102.067 48.133,101.805 48.133,89.868 U1.51@51.021,86.98
PC11: P3.2 U1.52 | length 17.5
  Top Layer w0.203: P3.2@46.871,102.542 47.014,102.399 47.014,101.585 47.371,101.228 47.371,89.929 50.668,86.633 U1.52@50.668,86.626
PC12: P3.1 U1.53 | length 18.1
  Top Layer w0.203: P3.1@45.871,102.542 46.069,102.344 46.069,101.766 46.5,101.335 46.736,101.099 46.736,89.851 U1.53@50.314,86.273
PC13: U1.2
PC14: U1.3
PC15: R3.2 U1.4 | length 33.7
  Top Layer w0.203: v2(45.593,77.343) 45.67,77.42 46.298,77.42 U1.4@47.486,78.608
  Bottom Layer w0.203: R3.2@42.582,94.996 42.582,95.171 43.423,96.012 44.45,96.012 44.958,95.504 44.958,87.704 46.228,86.434 46.228,82.042 44.831,80.645 42.672,80.645 41.783,79.756 41.783,76.327 42.926,75.184 43.815,75.184 44.647,76.016 44.647,76.397 v2(45.593,77.343)
PD2: U1.54
POWER3V3: D6.K F4.0 | length 7.1
  Bottom Layer w0.381: F4.0@36.703,100.036 37.719,100.036 38.291,99.464 38.291,98.486 40.386,96.39 D6.K@40.386,95.042
RESET: C1.2 R6.1 SW1.2 U1.7 | length 23
  Top Layer w0.203: v2(33.867,75.909) 36.751,75.909 36.924,75.736 36.924,75.561 41.492,70.993 43.688,70.993 45.78,73.085 45.78,74.781 U1.7@48.546,77.547
  Bottom Layer w0.203: C1.2@31.433,75.997 31.521,75.909 v2(33.867,75.909)
VCC: F2.0 J2.3 | length 42.2
  Bottom Layer w0.203: J2.3@29.337,91.233 29.037,91.233 26.797,93.473 26.797,104.902 28.067,106.172 50.078,106.172 51.856,104.394 F2.0@51.856,103.378
VCC_U_MotorDriverConnector1: J3_U_MotorDriverConnector1.4 J3_U_MotorDriverConnector2.4 J3_U_MotorDriverConnector3.4 J3_U_MotorDriverConnector4.4 Q2.3 | length 149.5
  Top Layer w0.203: J3_U_MotorDriverConnector4.4@79.121,66.802 79.121,66.515 79.519,66.116 79.807,66.116 80.645,65.278 86.619,65.278 88.778,63.119 107.696,63.119 ; v2(86.614,90.043) 86.614,90.443 87.992,91.821 115.656,91.821 115.697,91.78 ; J3_U_MotorDriverConnector3.4@109.474,66.421 109.474,64.897 107.696,63.119 ; J3_U_MotorDriverConnector1.4@116.967,90.11 116.967,90.51 115.697,91.78 ; 107.696,63.119 120.65,63.119 123.19,65.659 123.19,89.535 120.904,91.821 115.697,91.821 115.697,91.78
  Bottom Layer w0.203: Q2.3@68.438,98.044 68.438,95.265 69.385,94.318 72.22,94.318 75.692,97.79 87.884,97.79 90.043,95.631 90.043,93.345 v2@86.741,90.043
VDC: F1.0 J1.2 | length 8.8
  Top Layer w1.27: F1.0@84.704,101.854 J1.2@93.512,101.854
  other v1: 81.9,100.8 81.9,100.8 81.9,100.8 87.5,100.8 87.5,100.8 87.5,100.8 88.2,100.8 88.2,100.8 88.2,100.8 88.9,100.8 88.9,100.8 88.9,100.8 89.6,100.8 89.6,100.8 89.6,100.8 90.3,100.8 90.3,100.8 90.3,100.8 91,100.8 91,100.8 91,100.8 91.7,100.8 91.7,100.8 91.7,100.8 81.55,101.5 81.55,101.5 81.55,101.5 87.85,101.5 87.85,101.5 87.85,101.5 88.55,101.5 88.55,101.5 88.55,101.5 89.25,101.5 89.25,101.5 89.25,101.5 89.95,101.5 89.95,101.5 89.95,101.5 90.65,101.5 90.65,101.5 90.65,101.5 91.35,101.5 91.35,101.5 91.35,101.5 88.2,102.2 88.2,102.2 88.2,102.2 88.9,102.2 88.9,102.2 88.9,102.2 89.6,102.2 89.6,102.2 89.6,102.2 90.3,102.2 90.3,102.2 90.3,102.2 91,102.2 91,102.2 91,102.2 91.7,102.2 91.7,102.2 91.7,102.2 81.55,102.9 81.55,102.9 81.55,102.9 87.85,102.9 87.85,102.9 87.85,102.9 88.55,102.9 88.55,102.9 88.55,102.9 89.25,102.9 89.25,102.9 89.25,102.9 89.95,102.9 89.95,102.9 89.95,102.9 90.65,102.9 90.65,102.9 90.65,102.9 91.35,102.9 91.35,102.9 91.35,102.9 92.05,102.9 92.05,102.9 92.05,102.9 81.9,103.6 81.9,103.6 81.9,103.6 87.5,103.6 87.5,103.6 87.5,103.6 88.2,103.6 88.2,103.6 88.2,103.6 88.9,103.6 88.9,103.6 88.9,103.6 89.6,103.6 89.6,103.6 89.6,103.6 90.3,103.6 90.3,103.6 90.3,103.6 91,103.6 91,103.6 91,103.6 91.7,103.6 91.7,103.6 91.7,103.6 92.4,103.6 92.4,103.6 92.4,103.6 93.1,103.6 93.1,103.6 93.1,103.6 93.8,103.6 93.8,103.6 93.8,103.6 81.55,104.3 81.55,104.3 81.55,104.3 82.25,104.3 82.25,104.3 82.25,104.3 82.95,104.3 82.95,104.3 82.95,104.3 86.45,104.3 86.45,104.3 86.45,104.3 87.15,104.3 87.15,104.3 87.15,104.3 87.85,104.3 87.85,104.3 87.85,104.3 88.55,104.3 88.55,104.3 88.55,104.3 89.25,104.3 89.25,104.3 89.25,104.3 89.95,104.3 89.95,104.3 89.95,104.3 90.65,104.3 90.65,104.3 90.65,104.3 91.35,104.3 91.35,104.3 91.35,104.3 92.05,104.3 92.05,104.3 92.05,104.3 92.75,104.3 92.75,104.3 92.75,104.3 93.45,104.3 93.45,104.3 93.45,104.3
VDC_U_MotorDriverConnector1: J3_U_MotorDriverConnector1.6 J3_U_MotorDriverConnector2.6 J3_U_MotorDriverConnector3.6 J3_U_MotorDriverConnector4.6 Q5.4
  other v1: 81.55,74.2 82.25,74.2 106.05,74.2 106.75,74.2 107.45,74.2 108.15,74.2 108.85,74.2 109.55,74.2 110.25,74.2 110.95,74.2 111.65,74.2 112.35,74.2 81.2,74.9 81.9,74.9 82.6,74.9 105.7,74.9 106.4,74.9 107.1,74.9 107.8,74.9 108.5,74.9 109.2,74.9 109.9,74.9 110.6,74.9 111.3,74.9 112,74.9 81.55,75.6 82.25,75.6 106.05,75.6 106.75,75.6 107.45,75.6 108.15,75.6 108.85,75.6 109.55,75.6 110.25,75.6 110.95,75.6 111.65,75.6 112.35,75.6 81.2,76.3 81.9,76.3 82.6,76.3 105.7,76.3 81.55,77 82.25,77 82.95,77 81.2,77.7 81.9,77.7 82.6,77.7 83.3,77.7 84,77.7 84.7,77.7 85.4,77.7 86.1,77.7 86.8,77.7 87.5,77.7 88.2,77.7 88.9,77.7 89.6,77.7 81.55,78.4 82.25,78.4 82.95,78.4 83.65,78.4 84.35,78.4 85.05,78.4 85.75,78.4 86.45,78.4 87.15,78.4 87.85,78.4 88.55,78.4 89.25,78.4 89.95,78.4 81.2,79.1 81.9,79.1 82.6,79.1 83.3,79.1 84,79.1 84.7,79.1 85.4,79.1 86.1,79.1 86.8,79.1 87.5,79.1 88.2,79.1 88.9,79.1 89.6,79.1 81.55,79.8 82.25,79.8 82.95,79.8 83.65,79.8 84.35,79.8 85.05,79.8 85.75,79.8 86.45,79.8 87.15,79.8 87.85,79.8 88.55,79.8 89.25,79.8 89.95,79.8 81.2,80.5 81.9,80.5 82.6,80.5 83.3,80.5 84,80.5 84.7,80.5 85.4,80.5 86.1,80.5 86.8,80.5 87.5,80.5 88.2,80.5 88.9,80.5 89.6,80.5
  other v2: 109.422,79.502
VDCin: C18.2 D12.C F1.1 Q4.4
  other v1: 108.15,98 108.85,98 109.55,98 110.25,98 105.7,104.3 106.4,104.3 107.1,104.3 109.9,104.3 110.6,104.3
Vin: C17.2 D8.C F2.1 Q1.3 | length 23.1
  Bottom Layer w0.203: Q1.3@61.102,105.156 61.102,103.329 60.107,102.333 59.062,103.378 F2.1@56.058,103.378 56.058,100.698 58.275,98.481 58.275,95.955 58.287,95.944 58.287,94.482 60.807,91.961 61.88,91.961 D8.C@62.528,91.313
pads on no net: P1.MP1 P1.MP2 P3.MP1 P3.MP2 Scr1.1 Scr2.1 Scr3.1 Scr4.1 U1.1 U1.48 U2.5

## Polygon pours and split planes (outlines as drawn)
VDCin on Top Layer "VDCIN_L01_P005" (solid, pour order 5): 111.379,104.902 105.156,104.902 105.156,97.028 111.379,97.028
VDC_U_MotorDriverConnector1 on Top Layer "VDC_U_MOTORDRIVERCONNECTOR1_L01_P030" (solid, pour order 30): 82.288,91.067 85.344,91.067 85.344,82.55 85.471,82.423 104.648,82.423 104.648,85.717 104.656,85.725 112.776,85.725 112.776,91.44 112.794,91.458 115.506,91.458 115.506,68.453 113.8,68.453 113.8,66.167 110.228,66.167 110.228,68.453 105.156,68.453 105.156,76.581 83.312,76.581 83.185,76.454 83.185,65.913 80.518,65.913 80.518,88.889 82.288,88.889
MGND on Top Layer "MGND_L01_P017" (solid, pour order 17): 74.549,70.739 74.549,57.785 125.222,57.785 125.222,106.934 74.676,106.934 74.676,71.247 80.264,71.247 80.264,91.948 90.424,91.948 90.424,87.757 109.982,87.757 109.982,93.345 99.822,93.345 99.822,100.076 116.205,100.076 116.205,70.739
VDC on Top Layer "VDC_L01_P012" (solid, pour order 12): 94.996,105.156 80.899,105.156 80.899,99.822 94.996,99.822
GND on Top Layer "GND_L01_P001" (solid, pour order 1): 25.495,107.288 25.622,107.415 73.882,107.415 73.882,57.377 25.495,57.377 25.495,107.415
VDC on Bottom Layer "VDC_L02_P044" (solid, pour order 44): 94.996,105.156 80.899,105.156 80.899,99.822 94.996,99.822
VDC_U_MotorDriverConnector1 on Bottom Layer "VDC_U_MOTORDRIVERCONNECTOR1_L02_P043" (solid, pour order 43): 79.38,81.534 79.38,73.406 90.492,73.406 90.492,81.534
VDC_U_MotorDriverConnector1 on Bottom Layer "VDC_U_MOTORDRIVERCONNECTOR1_L02_P042" (solid, pour order 42): 105.918,82.296 112.903,82.296 112.903,73.025 105.156,73.025 105.156,81.534 105.918,81.534
VDCin on Bottom Layer "VDCIN_L02_P041" (solid, pour order 41): 109.601,93.345 107.188,93.345 107.188,98.228 105.156,100.26 105.156,104.902 111.379,104.902 111.379,100.457 114.681,97.155 114.681,89.535 115.697,89.535 118.237,86.995 118.237,82.169 116.078,82.169 116.078,85.09 114.935,86.233 113.665,86.233 113.665,82.931 106.299,82.931 106.299,89.662 109.601,89.662 109.601,91.779 112.522,94.7 112.522,96.266 109.601,96.266
MGND on Bottom Layer "MGND_L02_P039" (solid, pour order 39): 93.726,82.296 93.726,77.978 90.932,77.978 90.932,82.296
MGND on Bottom Layer "MGND_L02_P038" (solid, pour order 38): 116.078,81.915 116.078,78.105 113.284,78.105 113.284,72.39 116.205,72.39 121.793,77.978 121.793,81.915
MGND on Bottom Layer "MGND_L02_P018" (solid, pour order 18): 100.711,103.505 95.377,103.505 95.377,93.218 74.295,93.218 74.295,65.532 122.809,65.532 122.809,72.771 79.121,72.771 79.121,81.915 100.711,81.915 100.711,89.535
GND on Bottom Layer "GND_L02_P000" (solid, pour order 0): 25.527,107.315 25.654,107.442 73.914,107.442 73.914,57.404 25.527,57.404 25.527,107.442
VDC on Bottom Solder "VDC_L02_P026" (solid, pour order 26): 94.996,105.156 80.899,105.156 80.899,99.822 94.996,99.822
VDC_U_MotorDriverConnector1 on Bottom Solder "VDC_U_MOTORDRIVERCONNECTOR1_L02_P032" (solid, pour order 32): 79.375,81.534 79.375,73.406 90.487,73.406 90.487,81.534
VDC_U_MotorDriverConnector1 on Bottom Solder "VDC_U_MOTORDRIVERCONNECTOR1_L02_P031" (solid, pour order 31): 105.918,82.296 112.903,82.296 112.903,73.025 105.156,73.025 105.156,81.534 105.918,81.534
VDCin on Bottom Solder "VDCIN_L02_P037" (solid, pour order 37): 109.601,93.345 107.188,93.345 107.188,98.228 105.156,100.26 105.156,104.902 111.379,104.902 111.379,100.457 114.681,97.155 114.681,89.535 115.697,89.535 118.237,86.995 118.237,82.169 116.078,82.169 116.078,85.09 114.935,86.233 113.665,86.233 113.665,82.931 106.299,82.931 106.299,89.662 109.601,89.662 109.601,91.779 112.522,94.7 112.522,96.266 109.601,96.266
VDC on Bottom Solder "VDC_L02_P011" (solid, pour order 11): 94.996,105.156 80.899,105.156 80.899,99.822 94.996,99.822
VDC_U_MotorDriverConnector1 on Top Solder "VDC_U_MOTORDRIVERCONNECTOR1_L01_P029" (solid, pour order 29): 82.288,91.067 85.344,91.067 85.344,82.55 85.471,82.423 104.648,82.423 104.648,85.717 104.656,85.725 112.776,85.725 112.776,91.44 112.794,91.458 115.506,91.458 115.506,68.453 113.8,68.453 113.8,66.167 110.228,66.167 110.228,68.453 105.156,68.453 105.156,76.581 83.312,76.581 83.185,76.454 83.185,65.913 80.518,65.913 80.518,88.889 82.288,88.889

## Silkscreen, mask and mechanical layers (free items; w line width, h text height)
Top Overlay:
  drawing of 117 lines, arcs and shapes, not listed
  text "SWD" at 32.893,104.648 h0.8
  text "SWCLK" at 33.401,103.644 h1
  text "BOOT OPTION" at 77.089,103.632 h0.8 r270
  text "USART" at 38.354,102.489 h0.8
  text "GND" at 70.713,101.594 h1
  text "GND" at 73.888,101.594 h1
  text "SWDIO" at 33.528,101.104 h1
  text "BT0" at 74.676,100.324 h1
  text "BT1" at 70.993,100.313 h1
  text "C10/TX" at 42.154,99.822 h0.8 r90
  text "C12/CK" at 39.488,99.695 h0.8 r90
  text "C11/RX" at 40.885,99.695 h0.8 r90
  text "GND" at 43.815,99.441 h0.8 r90
  text "CANH" at 47.235,99.06 h0.8 r90
  text "CANL" at 48.378,99.06 h0.8 r90
  text "GND" at 49.911,98.806 h0.8 r90
  text "CAN" at 46.228,98.679 h0.8 r90
  text "3V3" at 70.993,98.292 h1
  text "3V3" at 74.803,98.292 h1
  text "MOTOR POWER" at 101.346,97.78 h0.8
  text "PB15/LED2" at 45.847,97.673 h0.8
  text "GND" at 33.02,97.536 h1
  text "VDC" at 101.727,96.912 h1
  text "MGND" at 103.886,96.647 h1
  text "PB14/LED1" at 45.847,96.275 h0.8
  text "3V3" at 33.02,95.123 h1
  text "PC15/LEDTEST" at 45.847,94.752 h0.8
  text "MCU POWER" at 36.439,94.36 h0.8 r270
  text "C1" at 70.739,94.107 h0.8 r90
  text "C2" at 72.011,94.107 h0.8 r90
  text "C1" at 100.965,93.98 h0.8 r90
  text "C2" at 102.237,93.98 h0.8 r90
  text "EN1" at 67.818,93.726 h0.8 r90
  text "EN2" at 69.342,93.726 h0.8 r90
  text "EN1" at 98.044,93.599 h0.8 r90
  text "EN2" at 99.568,93.599 h0.8 r90
  text "ENC1" at 65.151,93.472 h0.8 r90
  text "ENC2" at 66.548,93.345 h0.8 r90
  text "ENC1" at 95.377,93.345 h0.8 r90
  text "ENC2" at 96.774,93.218 h0.8 r90
  text "3V3" at 45.847,93.101 h0.8
  text "VCC" at 35.063,91.948 h1 r270
  text "3V3MCU" at 45.847,91.45 h0.8
  text "3V3" at 72.01,90.17 h0.8 r90
  text "3V3" at 102.236,90.043 h0.8 r90
  text "GND" at 67.944,89.916 h0.8 r90
  text "VDC" at 69.469,89.915 h0.8 r90
  text "VCC" at 70.739,89.915 h0.8 r90
  text "GND" at 98.17,89.789 h0.8 r90
  text "VDC" at 99.695,89.788 h0.8 r90
  text "VCC" at 100.965,89.788 h0.8 r90
  text "MGND" at 65.15,89.535 h0.8 r90
  text "MGND" at 66.547,89.535 h0.8 r90
  text "MGND" at 95.376,89.408 h0.8 r90
  text "MGND" at 96.773,89.408 h0.8 r90
  text "MOTOR DRIVER 2" at 64.262,89.027 h0.8 r90
  text "MOTOR DRIVER 1" at 94.488,88.9 h0.8 r90
  text "H-Bridge V7" at 72.702,88.646 h3 r270
  text "Part of HBirdge Board V7" at 70.49,88.392 h0.7 r270
  text "5V" at 34.937,86.995 h1 r270
  text "GND" at 33.837,84.074 h1 r270
  text "RESET" at 37.602,76.327 h0.8 r270
  text "PB11/BT1" at 37.601,73.533 h0.8 r270
  text "PB10/BT2" at 37.602,69.85 h0.8 r270
  text "MOTOR DRIVER 4" at 71.882,67.437 h0.8 r270
  text "MGND" at 69.597,66.929 h0.8 r270
  text "MGND" at 70.994,66.929 h0.8 r270
  text "MOTOR DRIVER 3" at 102.362,66.802 h0.8 r270
  text "VCC" at 65.405,66.549 h0.8 r270
  text "VDC" at 66.675,66.549 h0.8 r270
  text "GND" at 68.2,66.548 h0.8 r270
  text "3V3" at 64.134,66.294 h0.8 r270
  text "MGND" at 100.077,66.294 h0.8 r270
  text "MGND" at 101.474,66.294 h0.8 r270
  text "PB12/BT3" at 37.602,66.04 h0.8 r270
  text "VCC" at 95.885,65.914 h0.8 r270
  text "VDC" at 97.155,65.914 h0.8 r270
  text "GND" at 98.68,65.913 h0.8 r270
  text "3V3" at 94.614,65.659 h0.8 r270
  text "Technical Information" at 44.45,64.262 h1
  text "ENC2" at 69.596,63.119 h0.8 r270
  text "ENC1" at 70.993,62.992 h0.8 r270
  text "EN2" at 66.802,62.738 h0.8 r270
  text "EN1" at 68.326,62.738 h0.8 r270
  text "ENC2" at 100.076,62.484 h0.8 r270
  text "C2" at 64.133,62.357 h0.8 r270
  text "C1" at 65.405,62.357 h0.8 r270
  text "ENC1" at 101.473,62.357 h0.8 r270
  text "PB13/BT4" at 37.602,62.103 h0.8 r270
  text "EN2" at 97.282,62.103 h0.8 r270
  text "EN1" at 98.806,62.103 h0.8 r270
  text "C2" at 94.613,61.722 h0.8 r270
  text "C1" at 95.885,61.722 h0.8 r270
  text "QR" at 56.261,60.45 h2.5
  text "- VDC : 12 - 20V  / - VCC : 12 - 20V  / - Imax : < 10A (for safe) / - Reversevoltage protection / - Overvoltage protection / - Overcurrent protection / - Scan QR for more information" at 44.577,58.694 h0.8
Top Solder:
  text "RYA" at 75.692,87.757 h4 r270
Drill Guide:
  the board outline again, w0.254

## Text inside footprints (layer, text, board x,y; h text height)
C15: Bottom Overlay "+" at 36.203,79.854 h1.22 r270
C16: Bottom Overlay "+" at 37.203,87.532 h1.22 r90
D1: Top Overlay "+" at 45.466,96.266 h0.76 r90
D2: Top Overlay "+" at 45.428,97.79 h0.76 r90
D3: Top Overlay "+" at 45.466,93.091 h0.76 r90
D4: Top Overlay "+" at 45.466,94.742 h0.76 r90
D7: Top Overlay "+" at 45.466,91.44 h0.76 r90
J3_U_MotorDriverConnector1: Top Overlay "2" at 122.137,90.61 h1.02 r180; Top Overlay "1" at 121.737,95.81 h1.02 r180; Top Overlay "11" at 104.777,95.81 h1.02 r180; Top Overlay "12" at 104.877,90.61 h1.02 r180
J3_U_MotorDriverConnector2: Top Overlay "2" at 91.784,90.543 h1.02 r180; Top Overlay "1" at 91.384,95.743 h1.02 r180; Top Overlay "11" at 74.424,95.743 h1.02 r180; Top Overlay "12" at 74.524,90.543 h1.02 r180
J3_U_MotorDriverConnector3: Top Overlay "2" at 104.304,65.921 h1.02; Top Overlay "1" at 104.704,60.721 h1.02; Top Overlay "11" at 121.664,60.721 h1.02; Top Overlay "12" at 121.564,65.921 h1.02
J3_U_MotorDriverConnector4: Top Overlay "2" at 73.951,66.302 h1.02; Top Overlay "1" at 74.351,61.102 h1.02; Top Overlay "11" at 91.311,61.102 h1.02; Top Overlay "12" at 91.211,66.302 h1.02
P4: Top Overlay "2" at 60.627,98.573 h1.02 r90; Top Overlay "1" at 67.627,98.873 h1.02 r90; Top Overlay "5" at 67.627,106.313 h1.02 r90; Top Overlay "6" at 60.627,106.313 h1.02 r90
Q4: Mechanical 13 "1" at 105.423,83.947 h0.61 r270; Mechanical 13 "2" at 105.423,86.157 h0.61 r270; Mechanical 13 "3" at 105.423,88.341 h0.61 r270; Mechanical 13 "4" at 109.791,86.03 h0.61 r270
Q5: Mechanical 13 "1" at 105.042,77.089 h0.61 r270; Mechanical 13 "2" at 105.042,79.299 h0.61 r270; Mechanical 13 "3" at 105.042,81.483 h0.61 r270; Mechanical 13 "4" at 109.41,79.172 h0.61 r270
Q6: Mechanical 13 "1" at 94.971,81.42 h0.61 r180; Mechanical 13 "2" at 97.18,81.42 h0.61 r180; Mechanical 13 "3" at 99.365,81.42 h0.61 r180; Mechanical 13 "4" at 97.053,77.051 h0.61 r180